# EAGLE board band4.0 (EAGLE 7.6.0)
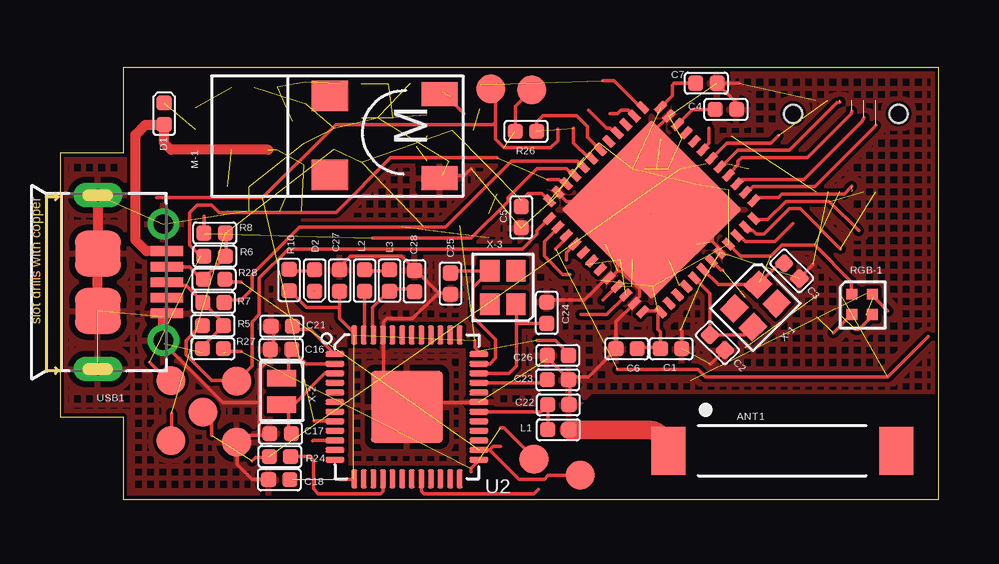
[diagram p0: board, top side]
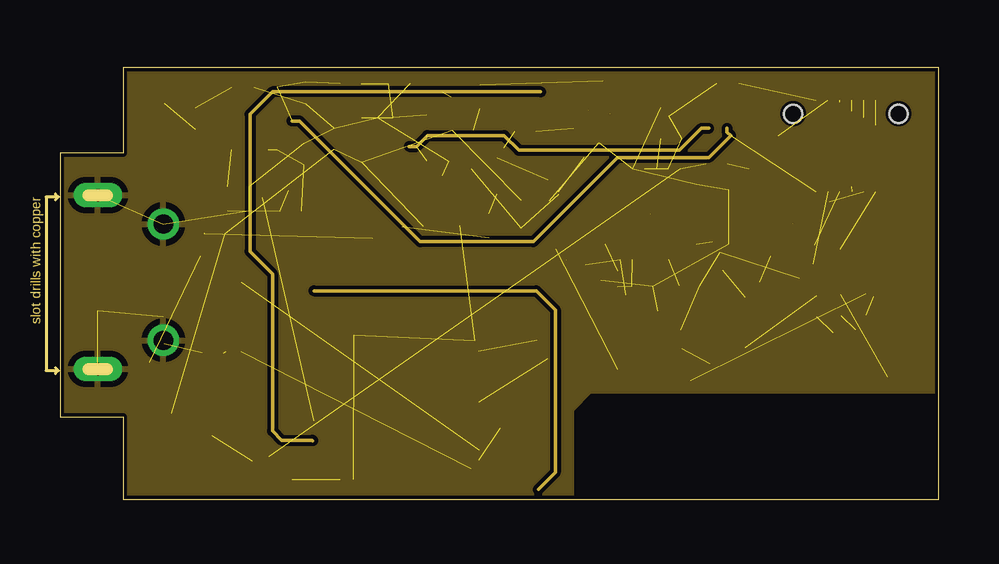
[diagram p1: board, inner layer GND]
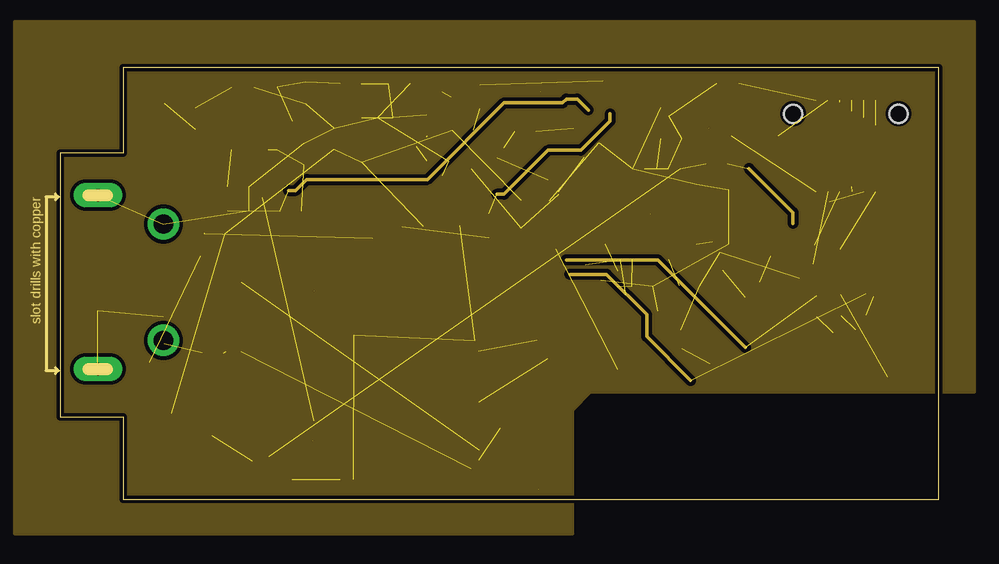
[diagram p2: board, inner layer +3V3]
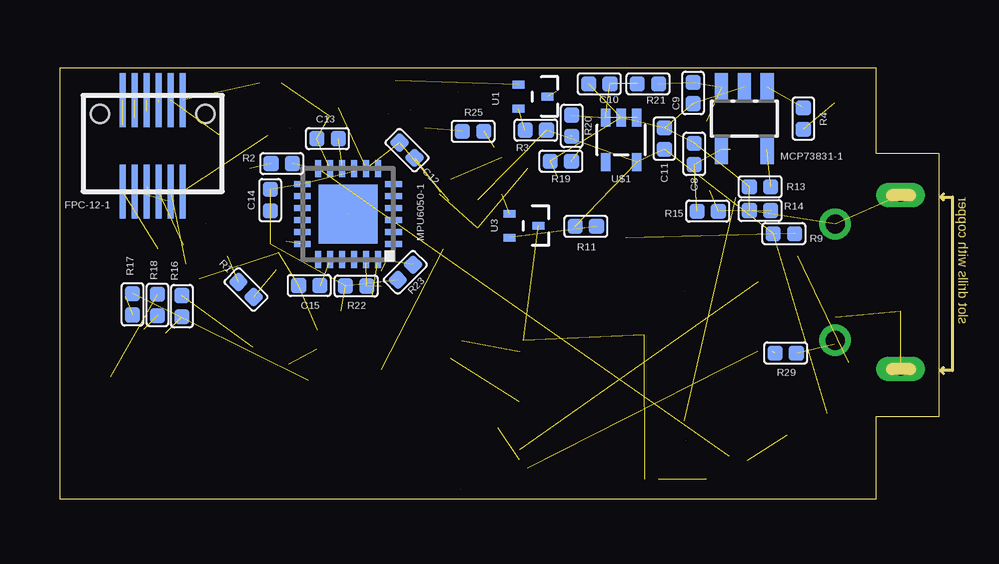
[diagram p3: board, bottom side, seen from below]

Size 36.63 x 18 mm. Coordinates in mm from the lower left corner, seen from the top.
Outline: 2.63,0 36.63,0 36.63,18 2.63,18 2.63,14.44 0,14.44 0,3.44 2.63,3.44 2.63,0
Copper layers (1*2+3*16): Top 0.035mm / dielectric 1.5mm / GND 0.035mm / dielectric 0.15mm / +3V3 0.035mm / dielectric 0.2mm / Bottom 0.035mm
Design rules "default *": minimum track width 6mil, minimum drill 12mil, track to track 6mil, track to pad 6mil, pad to pad 6mil, via to via 6mil, smd to smd 6mil, copper to edge 6mil, drill to drill 8mil, minimum pad ring 10mil, minimum via ring 2mil, stop-mask expansion 4mil, vias tented up to drill 12mil, thermal gap 10mil

## Footprints (pad centres in the part's own frame; a part is rotated, then mirrored left to right if it is on the bottom)
ANTENNA = smd 1.4 x 2: 1 -4.75,0; 2 4.75,0
C0402 = smd 0.635 x 0.635: 1 0,0.445; 2 0,-0.445
LED-0402 = smd 0.635 x 0.635: + -0.445,0; - 0.445,0
FPC-12 = smd 0.25 x 2.25: P$1 0,0; P$2 0.5,0; P$3 1,0; P$4 1.5,0; P$5 2,0; P$6 2.5,0; P$7 2.5,-3.8; P$8 2,-3.8; P$9 1.5,-3.8; P$10 1,-3.8; P$11 0.5,-3.8; P$12 0,-3.8 | hole 0.75: -0.95,-0.56; 3.45,-0.56
L0402 = smd 0.635 x 0.635: 1 -0.445,0; 2 0.445,0
MOTOR = smd 1 x 1.5: 1 -3.556,0; 2 -0.056,0 | smd 1.27 x 1.524: 3 -0.127,4.572; 4 -3.429,4.572
SOT23-5 = smd 0.55 x 1.2: 1 -0.95,-1.3; 2 0,-1.3; 3 0.95,-1.3; 4 0.95,1.3; 5 -0.95,1.3
QFN24-4X4 = smd 0.7 x 0.25: 1 -1.9,1.25; 2 -1.9,0.75; 3 -1.9,0.25; 4 -1.9,-0.25; 5 -1.9,-0.75; 6 -1.9,-1.25; 13 1.9,-1.25; 14 1.9,-0.75; 15 1.9,-0.25; 16 1.9,0.25; 17 1.9,0.75; 18 1.9,1.25 | smd 0.25 x 0.7: 7 -1.25,-1.9; 8 -0.75,-1.9; 9 -0.25,-1.9; 10 0.25,-1.9; 11 0.75,-1.9; 12 1.25,-1.9; 19 1.25,1.9; 20 0.75,1.9; 21 0.25,1.9; 22 -0.25,1.9; 23 -0.75,1.9; 24 -1.25,1.9 | smd 2.45 x 2.45: EXP 0,0
R0402 = smd 0.635 x 0.635: 1 0,0.445; 2 0,-0.445
RGB-LED = smd 0.45 x 0.45: P$1 0,0; P$2 0.85,0; P$3 0.85,-0.85; P$4 0,-0.85
QFN48-7X7 = smd 0.55 x 0.3: 1 -3.275,2.75; 2 -3.275,2.25; 3 -3.275,1.75; 4 -3.275,1.25; 5 -3.275,0.75; 6 -3.275,0.25; 7 -3.275,-0.25; 8 -3.275,-0.75; 9 -3.275,-1.25; 10 -3.275,-1.75; 11 -3.275,-2.25; 12 -3.275,-2.75; 25 3.275,-2.75; 26 3.275,-2.25; 27 3.275,-1.75; 28 3.275,-1.25; 29 3.275,-0.75; 30 3.275,-0.25; 31 3.275,0.25; 32 3.275,0.75; 33 3.275,1.25; 34 3.275,1.75; 35 3.275,2.25; 36 3.275,2.75 | smd 0.3 x 0.55: 13 -2.75,-3.275; 14 -2.25,-3.275; 15 -1.75,-3.275; 16 -1.25,-3.275; 17 -0.75,-3.275; 18 -0.25,-3.275; 19 0.25,-3.275; 20 0.75,-3.275; 21 1.25,-3.275; 22 1.75,-3.275; 23 2.25,-3.275; 24 2.75,-3.275; 37 2.75,3.275; 38 2.25,3.275; 39 1.75,3.275; 40 1.25,3.275; 41 0.75,3.275; 42 0.25,3.275; 43 -0.25,3.275; 44 -0.75,3.275; 45 -1.25,3.275; 46 -1.75,3.275; 47 -2.25,3.275; 48 -2.75,3.275 | smd 5.309 x 5.309: EXP 0,0
PNP = smd 0.325 x 0.5: 1 -0.5,-1.2; 2 0.5,-1.2; 3 0,0
QFN48G-0.4-6X6MM = smd 0.8 x 0.25: 1 -3,2.2; 2 -3,1.8; 3 -3,1.4; 4 -3,1; 5 -3,0.6; 6 -3,0.2; 7 -3,-0.2; 8 -3,-0.6; 9 -3,-1; 10 -3,-1.4; 11 -3,-1.8; 12 -3,-2.2; 25 3,-2.2; 26 3,-1.8; 27 3,-1.4; 28 3,-1; 29 3,-0.6; 30 3,-0.2; 31 3,0.2; 32 3,0.6; 33 3,1; 34 3,1.4; 35 3,1.8; 36 3,2.2 | smd 0.25 x 0.8: 13 -2.2,-3; 14 -1.8,-3; 15 -1.4,-3; 16 -1,-3; 17 -0.6,-3; 18 -0.2,-3; 19 0.2,-3; 20 0.6,-3; 21 1,-3; 22 1.4,-3; 23 1.8,-3; 24 2.2,-3; 37 2.2,3; 38 1.8,3; 39 1.4,3; 40 1,3; 41 0.6,3; 42 0.2,3; 43 -0.2,3; 44 -0.6,3; 45 -1,3; 46 -1.4,3; 47 -1.8,3; 48 -2.2,3 | smd 3 x 3: PAD 0,0
SC-70-5 = smd 0.4 x 0.75: 1 -0.65,-0.925; 2 0,-0.925; 3 0.65,-0.925; 4 0.65,0.925; 5 -0.65,0.925
TEST-POINT = smd 1.2 x 1.2: P$1 0,0
MICRO-USB5+6P-SMD-0.65-AB = smd 0.4 x 1.35: 1 -1.3,2.875; 2 -0.65,2.875; 3 0,2.875; 4 0.65,2.875; 5 1.3,2.875 | smd 1.9 x 1.9: P1 -1.2,0; P2 1.2,0 | drill 0.508 pad 1.016 long: P3 -3.625,0; P4 3.625,0 | drill 0.8: P5 -2.425,2.73; P6 2.425,2.73
16MHZ = smd 0.9 x 0.8: 1 0,-1.1; 2 1.4,-1.1; 3 1.4,0; 4 0,0
32.768KHZ = smd 0.7 x 1.2: P$1 -0.55,0; P$2 0.55,0

## Placement (x,y rotation side)
ANT1  ANT8030-2R4-01A  [ANTENNA]  30.11,2.03 0 top
C1  0.1uf  [C0402]  25.48,6.28 270 top
C2  20pf  [C0402]  27.41,6.53 225 top
C3  20pf  [C0402]  30.5,9.53 225 top
C4  4.7uf  [C0402]  27.76,16.26 270 top
C5  0.1uf  [C0402]  19.23,11.77 0 top
C6  0.1uf  [C0402]  23.62,6.28 270 top
C7  0.1uf  [C0402]  26.95,17.35 270 top
C8  4.7uf  [C0402]  10.18,14.41 0 bottom
C9  4.7uf  [C0402]  10.24,16.95 180 bottom
C10  10uf  [C0402]  14.15,17.33 90 bottom
C11  1uf  [C0402]  11.43,15.04 0 bottom
C12  10nf  [C0402]  22.16,14.56 225 bottom
C13  0.1uf  [C0402]  25.48,15.04 90 bottom
C14  0.1uf  [C0402]  27.86,12.48 180 bottom
C15  2.2nf  [C0402]  26.24,8.92 90 bottom
C16  12pf  [C0402]  9.22,6.25 90 top
C17  12pf  [C0402]  9.19,2.75 90 top
C18  100nf  [C0402]  9.14,0.82 90 top
C21  100nf  [C0402]  9.25,7.22 90 top
C22  0.8pf  [C0402]  20.78,3.94 90 top
C23  100pf  [C0402]  20.75,4.98 90 top
C24  12pf  [C0402]  20.29,7.78 180 top
C25  12pf  [C0402]  16.28,9 0 top
C26  100nf  [C0402]  20.75,6 270 top
C27  4.7uf  [C0402]  11.66,9.12 180 top
C28  1uf  [C0402]  14.78,9.1 0 top
D1  BLUE-0402  [LED-0402]  4.34,16.08 90 top
D2  BLUE-0402  [LED-0402]  10.62,9.12 270 top
FPC-12-1  FPC-12  [FPC-12]  34.01,16.64 0 bottom
L1  3.9nh  [L0402]  20.78,2.9 0 top
L2  10uh  [L0402]  12.7,9.12 90 top
L3  15nh  [L0402]  13.74,9.12 270 top
M-1  MOTOR  [MOTOR]  15.81,16.95 90 top
MCP73831-1  MCP73831  [SOT23-5]  8.1,15.88 180 bottom
MPU6050-1  MPU-6050  [QFN24-4X4]  24.62,11.9 180 bottom
R1  10k  [R0402]  28.87,8.75 45 bottom
R2  0R  [R0402]  27.38,14 270 bottom
R3  0R  [R0402]  16.79,15.4 90 bottom
R4  470R  [R0402]  5.64,15.88 0 bottom
R5  0R  [R0402]  6.37,7.24 90 top
R6  0R  [R0402]  6.45,10.14 90 top
R7  0R  [R0402]  6.4,8.21 270 top
R8  0R  [R0402]  6.45,11.11 90 top
R9  1.5k  [R0402]  6.45,11.08 90 bottom
R10  1k  [R0402]  9.55,9.15 180 top
R11  0R  [R0402]  14.71,11.39 270 bottom
R13  2k  [R0402]  7.44,13.04 90 bottom
R14  10k  [R0402]  7.44,12.05 270 bottom
R15  20k  [R0402]  9.63,12.02 90 bottom
R16  2k  [R0402]  31.55,8.06 180 bottom
R17  2k  [R0402]  33.6,8.13 0 bottom
R18  2k  [R0402]  32.56,8.11 0 bottom
R19  10k  [R0402]  15.75,14.1 270 bottom
R20  10k  [R0402]  15.29,15.58 0 bottom
R21  0R  [R0402]  12.12,17.33 90 bottom
R22  10k  [R0402]  24.28,8.9 270 bottom
R23  10k  [R0402]  22.23,9.47 315 bottom
R24  0R  [R0402]  9.17,1.78 90 top
R25  0R  [R0402]  19.41,15.35 90 bottom
R26  0R  [R0402]  19.43,15.35 270 top
R27  0R  [R0402]  6.37,6.28 90 top
R28  0R  [R0402]  6.43,9.18 90 top
R29  10k  [R0402]  6.37,6.1 270 bottom
RGB-1  RGB-LED  [RGB-LED]  33.01,8.55 0 top
STM32F411-1  STM32F411  [QFN48-7X7]  24.67,12.08 135 top
U1  [PNP]  16.31,16.8 270 bottom
U2  RF-51822  [QFN48G-0.4-6X6MM]  14.46,3.86 0 top
U3  [PNP]  16.69,11.41 270 bottom
U$1  RT9013  [SC-70-5]  13.23,14.99 180 bottom
U$2  TEST-POINT  [TEST-POINT]  7.37,4.93 0 top
U$3  TEST-POINT  [TEST-POINT]  4.62,4.96 0 top
U$4  TEST-POINT  [TEST-POINT]  5.97,3.64 0 top
U$5  TEST-POINT  [TEST-POINT]  4.62,2.44 0 top
U$6  TEST-POINT  [TEST-POINT]  7.37,2.38 0 top
U$7  TEST-POINT  [TEST-POINT]  21.69,1.02 0 top
U$8  TEST-POINT  [TEST-POINT]  19.76,1.68 0 top
U$9  TEST-POINT  [TEST-POINT]  19.66,17.07 0 top
U$10  TEST-POINT  [TEST-POINT]  17.96,17.13 0 top
USB1  ZX62-B-5PA  [MICRO-USB5+6P-SMD-0.65-AB]  1.58,9.05 270 top
X-1  16MHZ  [16MHZ]  29.88,8.17 225 top
X-2  32.768KHZ  [32.768KHZ]  9.25,4.5 90 top
X-3  32MHZ  [16MHZ]  17.92,8.13 90 top

## Library data of the parts
ANT1 FPC-12-1 L1-L3 M-1 MCP73831-1 MPU6050-1 RGB-1 STM32F411-1 U1 U3 U$1-U$10 X-1-X-3 = 1-BT4
C1-C18 C21-C28 = 1-BT4; MPN: CC0402BRNPO9BNR50
D1 D2 = 1-BT4; MPN: BL-HB337A-AV-TRB
R1-R11 R13-R29 = 1-BT4; MPN: RC0402JR-070RL
U2 = 1-BT4; MPN: RF-51822
USB1 = 1-BT4; MPN: ZX62-B-5PA

## Nets
+3.7V: C9.2 FPC-12-1.P$7 MCP73831-1.3 R21.2
+3V3: C1.2 C5.1 C6.1 C7.2 C11.2 C12.2 C14.2 FPC-12-1.P$9 MPU6050-1.8 MPU6050-1.13 R1.1 R3.2 R9.1 R11.2 R22.2 R23.2 RGB-1.P$1 STM32F411-1.1 STM32F411-1.9 STM32F411-1.24 STM32F411-1.36 STM32F411-1.48 U$1.5 U$5.P$1
+5V: C8.2 D1.+ MCP73831-1.4 R15.1 USB1.1
BT_CONTROL: STM32F411-1.26 U3.1
BT_POWER: C18.2 C26.1 C27.1 R10.1 U2.13 U2.36 U2.48 U3.3
GND: C1.1 C2.1 C3.1 C4.1 C5.2 C6.2 C7.1 C8.1 C9.1 C10.1 C11.1 C12.1 C13.1 C14.1 C15.1 C16.1 C17.1 C18.1 C21.1 C22.2 C23.2 C24.2 C25.2 C26.2 C27.2 C28.1 FPC-12-1.P$6 FPC-12-1.P$8 M-1.1 MCP73831-1.2 MPU6050-1.1 MPU6050-1.9 MPU6050-1.11 MPU6050-1.18 MPU6050-1.EXP R13.1 R14.2 R19.2 R29.1 STM32F411-1.8 STM32F411-1.23 STM32F411-1.35 STM32F411-1.44 STM32F411-1.47 STM32F411-1.EXP U2.31 U2.45 U2.PAD U$1.2 U$6.P$1 USB1.5 USB1.P1 USB1.P2 USB1.P3 USB1.P4 USB1.P5 USB1.P6
IIC2_SCL: MPU6050-1.23 R22.1 STM32F411-1.45
IIC2_SDA: MPU6050-1.24 R23.1 STM32F411-1.46
LED1: R17.1 STM32F411-1.38
LED2: R18.1 STM32F411-1.39
LED3: R16.2 STM32F411-1.40
LI_BAT1: R19.1 R20.2 STM32F411-1.19
LI_BAT2: R14.1 R15.2 STM32F411-1.28
MOTOR_CONTROL: STM32F411-1.25 U1.1
N$1: C2.2 STM32F411-1.5 X-1.3
N$2: C3.2 STM32F411-1.6 X-1.1
N$3: R1.2 STM32F411-1.7
N$4: R2.2 STM32F411-1.10
N$5: MCP73831-1.1 R4.1
N$6: D1.- R4.2
N$7: MCP73831-1.5 R13.2
N$8: R16.1 RGB-1.P$4
N$9: R17.2 RGB-1.P$2
N$10: R18.2 RGB-1.P$3
N$11: C21.2 U2.1
N$12: C13.2 MPU6050-1.10
N$13: C16.2 U2.2 X-2.P$2
N$14: C10.2 R20.1 R21.1 U$1.1 U$1.3
N$15: C15.2 MPU6050-1.20
N$16: C17.2 U2.3 X-2.P$1
N$17: R25.2 U2.8 U$10.P$1
N$18: R24.2 U2.16
N$19: D2.+ R10.2
N$20: R26.2 U2.10 U$9.P$1
N$21: D2.- U2.20
N$22: R11.1 U3.2
N$23: R27.2 R29.2 U2.25 U$8.P$1
N$25: R28.2 U2.26 U$7.P$1
N$27: ANT1.1 L1.2
N$28: C4.2 STM32F411-1.22
N$29: M-1.2 U1.3
N$30: R3.1 U1.2
N$31: C22.1 L1.1 U2.30
N$32: C23.1 U2.33
N$33: C24.1 U2.34 X-3.1
N$34: C25.1 U2.35 X-3.3
N$35: L2.2 L3.1
N$36: L2.1 U2.47
N$37: C28.2 L3.2 U2.46
SWCLK: R5.1 STM32F411-1.37 U$2.P$1
SWDIO: R6.1 STM32F411-1.34 U$3.P$1
UART1_RX: R25.1 STM32F411-1.31
UART1_TX: R26.1 STM32F411-1.30
USB_D+: R8.1 R9.2 STM32F411-1.33
USB_D-: R7.1 STM32F411-1.32
USB_PORT2: R5.2 R7.2 R27.1 USB1.3
USB_PORT3: R6.2 R8.2 R28.1 USB1.2
V1: FPC-12-1.P$10 STM32F411-1.13
V2: FPC-12-1.P$11 STM32F411-1.12
V3: FPC-12-1.P$12 STM32F411-1.11
V4: FPC-12-1.P$1 STM32F411-1.14
V5: FPC-12-1.P$2 STM32F411-1.15
V6: FPC-12-1.P$3 STM32F411-1.16
V7: FPC-12-1.P$4 STM32F411-1.17
V8: FPC-12-1.P$5 STM32F411-1.18
WKUP: MPU6050-1.12 R2.1 R24.1 U$4.P$1

## Tracks (layer width: path | path; a pad name or v marks a point on that pad's centre or on a via)
+3.7V  (4 unrouted)
  GND 0.152: 9.68,15.78 9.98,15.78 15.01,10.75 19.74,10.75 23.24,14.25 27.05,14.25 27.97,15.17 27.81,15.32 27.81,15.47
+3V3  (17 unrouted)
  Top 0.152: STM32F411-1.36 20.1,12.76 19.51,12.76 19.23,12.48 C5.1 | STM32F411-1.9 28.4,10.11 28.42,10.14 29.64,10.14 30.1,10.6 31.47,10.6 32.99,9.07 32.99,8.62 RGB-1.P$1 | C7.2 25.6,17.35 25.53,17.28 25.53,16.83 STM32F411-1.24 | STM32F411-1.48 24.31,7.85 24.92,7.85 STM32F411-1.1 24.92,7.7 24.92,7.09 25.03,6.98 C1.2 24.92,6.33 24.16,6.33 C6.1 | 4.65,3.59 4.65,2.52 U$5.P$1
  pour +3V3: -1.88,19.92 38.12,19.92 38.12,5.44 38.12,4.48 22.12,4.48 21.36,3.71 21.36,-1.44 -1.88,-1.44
+5V  (3 unrouted)
  Top 0.406: USB1.1 3.6,10.35 3.15,10.8 3.15,15.22 3.56,15.63 4.33,15.63 D1.+ 4.34,14.86 4.62,14.59 8.69,14.59
BT_CONTROL  (2 unrouted)
  Top 0.152: 22.94,16.08 23.24,16.08 23.39,16.24 23.7,16.24 23.85,16.08 STM32F411-1.26
  +3V3 0.152: 18.21,12.73 18.52,12.73 20.35,14.56 21.72,14.56 22.94,15.78 22.94,16.08
BT_POWER  (5 unrouted)
  Top 0.152: 11.66,8.01 11.66,7.55 11.81,7.4 12.27,6.94 U2.48 | 11.66,8.01 C27.1 | 11.66,8.01 10.29,8.01 9.68,8.62 R10.1 | 9.6,0.82 9.68,0.84 C18.2 | 12.27,0.84 U2.13 12.25,0.84 11.68,0.84 | 17.3,6.63 17.3,6.33 17.45,6.18 U2.36 | 19.89,6.63 20.65,6.63 21.11,6.18 21.11,6.03 C26.1
GND  (32 unrouted)
  Top 0.152: C1.1 25.92,7.03 25.88,7.07 | C2.1 27.15,5.64 27.1,5.64 | C3.1 31.39,9.79 31.39,9.81 | C4.1 28.21,16.54 C7.1 28.3,17.35 | STM32F411-1.23 24.67,15.26 STM32F411-1.EXP | STM32F411-1.EXP 24.62,12.04 MPU6050-1.EXP 24.67,11.94 STM32F411-1.EXP | U2.PAD 15.6,3.86 15.6,4.91 13.49,4.91 13.49,3.05 13.61,3.05 13.61,4.83 15.29,4.83 15.29,3.03 | C23.2 21.26,4.96 21.26,4.05 C22.2 | C26.2 20.35,5.87 21.11,5.11 C23.2 | 23.24,9.53 23.09,9.38 22.94,9.38 STM32F411-1.44 22.78,9.23 21.87,8.31 20.35,8.31 C24.2 | 23.24,9.53 23.39,9.53 24.16,8.77 24.16,8.46 24,8.31 STM32F411-1.47 23.18,7.41 C6.2 23.09,6.18 22.02,5.11 21.26,5.11 C23.2 | 23.24,12.43 24.61,12.43 STM32F411-1.EXP | 23.24,12.43 21.11,12.43 20.8,12.73 STM32F411-1.35 | 27.81,11.97 27.2,11.36 27.2,10.75 27.51,10.44 STM32F411-1.8 | 23.24,12.43 23.24,9.53 | 23.24,12.43 STM32F411-1.EXP | 17.14,13.8 16.84,13.49 15.93,13.49 M-1.1 | 27.81,11.97 STM32F411-1.EXP | 27.81,11.97 C14.1 | C21.1 8.92,7.09 8.92,6.33 C16.1 8.76,6.18 8.76,5.87 8.31,5.42 8.31,4.05 | C18.1 8.61,0.84 8,0.84 7.39,1.45 7.39,2.37 U$6.P$1 7.39,2.52 7.54,2.67 8.31,2.67 | 8.31,2.67 8.61,2.67 C17.1 | 8.31,2.67 8.31,4.05 | 15.77,8.62 16.23,8.62 C25.2 | 15.77,8.62 14.86,9.53 C28.1 14.71,9.68 14.25,10.14 12.12,10.14 11.66,9.68 C27.2 | U2.PAD 13.49,4.96 13.49,6.79 U2.45 13.49,6.94 13.49,7.4 13.64,7.55 14.71,7.55 15.77,8.62 | U2.31 17.45,4.05 15.62,4.05 U2.PAD | 8.31,4.05 6.78,4.05 4.34,6.48 USB1.P6
  Top 0.406: USB1.P2 USB1.P1 USB1.P3 | USB1.P6 4.31,7.61 USB1.5
  pour GND: -3.4,22.23 37.85,22.23 37.85,6.03 37.85,4.48 22.12,4.48 21.36,3.71 21.36,-0.98 -3.4,-0.98
  pour Top (hatched): -3.12,20.68 37.97,20.68 37.97,4.86 37.97,4.48 22.12,4.48 21.36,3.71 21.36,-0.73 -3.12,-0.73
IIC2_SCL  (2 unrouted)
  Top 0.152: 22.63,8.31 23.09,8.77 STM32F411-1.45
IIC2_SDA  (2 unrouted)
  Top 0.152: 21.72,7.7 22.78,7.7 23.55,8.46 STM32F411-1.46
LED1  (2 unrouted)
  Top 0.152: 21.26,9.38 20.95,9.38 20.19,10.14 20.19,10.75 20.65,11.21 STM32F411-1.38
  +3V3 0.152: 21.26,9.38 22.78,9.38 24.46,7.7 24.46,6.79 26.29,4.96
LED2  (2 unrouted)
  Top 0.152: 20.65,10.44 21.11,10.9 STM32F411-1.39 | 23.24,5.42 26.59,5.42 26.9,5.11 34.52,5.11 36.19,6.79
LED3  (2 unrouted)
  Top 0.152: 21.11,9.99 21.11,10.29 21.41,10.6 STM32F411-1.40
  +3V3 0.152: 21.11,9.99 24.92,9.99 28.57,6.33
LI_BAT1  (3 unrouted)
  Top 0.152: 27.05,15.47 27.05,14.86 26.9,14.71 STM32F411-1.19
  GND 0.152: 27.05,15.47 26.75,15.47 25.83,14.56 19.13,14.56 18.52,15.17 15.32,15.17 14.86,14.71 14.55,14.71
LI_BAT2  (3 unrouted)
  Top 0.152: 22.02,16.24 22.78,15.47 22.94,15.47 23.09,15.32 STM32F411-1.28
  +3V3 0.152: 22.02,16.24 21.56,16.69 21.11,16.69 20.95,16.54 18.52,16.54 15.32,13.34 10.29,13.34 9.83,12.88 9.52,12.88
MOTOR_CONTROL  (1 unrouted)
  Top 0.152: 22.63,17.46 23.09,17.46 24.16,16.39 STM32F411-1.25
N$1
  Top 0.152: STM32F411-1.5 27.09,8.59 C2.2 28.55,6.85 X-1.3
N$2
  Top 0.152: STM32F411-1.6 27.44,8.95 X-1.1 29.99,9.84 C3.2
N$3  (1 unrouted)
  Top 0.152: STM32F411-1.7 27.54,9.56 27.61,9.56
N$4  (2 unrouted)
  Top 0.152: 30.56,11.51 29.79,10.75 28.57,10.75 28.42,10.9 28.27,10.9 STM32F411-1.10
  +3V3 0.152: 30.56,11.51 30.56,11.97 28.73,13.8
N$5  (1 unrouted)
N$6  (1 unrouted)
N$7  (1 unrouted)
N$8  (1 unrouted)
  Top 0.152: 32.23,6.94 32.99,7.7 RGB-1.P$4
N$9  (1 unrouted)
  Top 0.152: 34.52,7.85 33.91,8.46 RGB-1.P$2
N$10  (1 unrouted)
  Top 0.152: 33.15,7.09 33.3,7.09 33.76,7.55 33.76,7.7 RGB-1.P$3
N$11
  Top 0.152: C21.2 9.83,7.09 10.44,7.09 11.35,6.18 U2.1
N$12  (1 unrouted)
N$13
  Top 0.152: X-2.P$2 9.37,5.11 9.52,5.26 9.52,6.18 C16.2 10.26,5.66 U2.2
N$14  (4 unrouted)
N$15  (1 unrouted)
N$16
  Top 0.152: 9.52,3.74 9.52,2.82 C17.2 | 9.52,3.74 9.37,3.89 X-2.P$1 9.52,3.74 | 9.52,3.74 11.05,5.26 11.35,5.26 U2.3
N$17  (2 unrouted)
  Top 0.152: 18.06,17 U$10.P$1 18.16,16.92 18.16,15.73 | 10.59,3.28 11.35,3.28 U2.8 | 4.04,12.58 8.46,12.58 11.51,15.63 18.06,15.63 18.16,15.73 | 20.75,15.45 20.75,14.97 20.45,14.66 18.52,14.66 18.16,15.02 18.16,15.73
N$18
  Top 0.152: U2.16 13.46,0.34 13.36,0.23 10.78,0.23 10.77,0.23 10.57,0.44 10.57,1.63 10.41,1.78 R24.2
N$19
  Top 0.152: D2.+ 10.59,9.53 9.68,9.53 R10.2
N$20  (2 unrouted)
  Top 0.152: U2.10 10.55,2.46 10.54,2.44 | 20.04,17 19.96,16.92 U$9.P$1 18.99,16.4 R26.2
  GND 0.152: 20.04,17 8.86,17 7.92,16.06 7.92,10.34 8.86,9.4 8.86,2.85 9.25,2.47 10.52,2.47 10.54,2.44
N$21  (2 unrouted)
  Top 0.152: U2.20 15.06,0.34 15.17,0.23 19.76,0.23 19.94,0.41 | D2.- 10.59,8.69
  GND 0.152: 10.59,8.69 19.86,8.69 20.65,7.91 20.65,1.12 19.94,0.41
N$22  (1 unrouted)
N$23  (3 unrouted)
  Top 0.152: 7.54,6.18 6.93,6.18 R27.2 | 17.14,1.15 17.14,1.3 17.45,1.61 U2.25 | 18.36,2.98 18.52,2.98 19.74,1.76 U$8.P$1
N$25  (1 unrouted)
  Top 0.152: 7.54,9.07 6.93,9.07 R28.2 | 18.36,2.22 18.06,2.22 17.91,2.06 | 17.91,2.06 17.6,2.06 U2.26 | 17.91,2.06 19.13,0.84 20.19,0.84 20.35,1 21.56,1 U$7.P$1
N$27
  Top 0.762: L1.2 24.5,2.9 arc-90 ANT1.1
N$28
  Top 0.152: STM32F411-1.22 26.37,16.26 C4.2
N$29  (1 unrouted)
  Top 0.152: 16.84,16.08 15.93,17 M-1.2
N$30  (1 unrouted)
N$31
  Top 0.152: L1.1 20.35,2.98 20.35,3.89 C22.1 20.05,3.66 U2.30
N$32
  Top 0.152: U2.33 20.18,4.86 C23.1
N$33
  Top 0.152: U2.34 18.71,5.26 19.02,5.57 19.02,7.35 | 19.02,7.35 X-3.1 | C24.1 19.04,7.33 19.02,7.35
N$34
  Top 0.152: C25.1 16.38,9.53 X-3.3 17.22,8.84 17.22,7.6 18.16,6.66 18.16,5.9 17.92,5.66 U2.35
N$35
  Top 0.152: L2.2 12.73,9.53 13.64,9.53 L3.1
N$36
  Top 0.152: 12.67,8.52 L2.1 12.7,6.95 12.67,6.93 U2.47
N$37
  Top 0.152: C28.2 14.71,8.77 13.79,8.77 L3.2 13.64,8.62 13.03,8.01 13.03,6.94 U2.46
SWCLK
  Top 0.152: STM32F411-1.37 20.35,11.66 19.89,11.21 19.89,11.05 19.28,10.44 9.52,10.44 8.31,9.23 8.31,7.7 8,7.4 8,5.57 7.39,4.96 U$2.P$1 7.24,4.96 6.32,4.96 5.26,6.03 5.26,6.63 5.87,7.24 R5.1
SWDIO  (2 unrouted)
  Top 0.152: 20.35,13.34 20.8,13.34 20.95,13.19 21.11,13.19 STM32F411-1.34 | 18.21,14.25 13.79,14.25 11.51,11.97 6.63,11.97 6.32,12.27 5.71,12.27 5.41,11.97 5.41,11.66 5.41,10.6 5.87,10.14 R6.1 | 3.73,5.72 4.5,4.96 U$3.P$1
UART1_RX  (1 unrouted)
  Top 0.152: 21.41,15.47 21.41,14.86 22.02,14.25 STM32F411-1.31
UART1_TX
  Top 0.152: STM32F411-1.30 22,15.1 22,15.55 21.54,16.01 20.14,16.01 19.88,15.74 R26.1
USB_D+  (2 unrouted)
  Top 0.152: 13.03,10.9 17.14,10.9 18.67,12.43 18.67,12.58 19.89,13.8 21.11,13.8 21.26,13.65 21.41,13.65 STM32F411-1.33 | 6.02,11.82 6.02,11.21 R8.1
USB_D-
  Top 0.152: STM32F411-1.32 21.72,13.95 21.56,14.1 18.82,14.1 16.08,11.36 9.98,11.36 8,9.38 8,8.77 7.54,8.31 6.93,8.31 R7.1
USB_PORT2
  Top 0.152: USB1.3 4.5,8.92 5.26,8.92 5.87,8.31 R7.2 6.02,8.16 6.93,7.24 R5.2 5.93,6.36 R27.1
USB_PORT3
  Top 0.152: 6.93,10.14 6.02,9.23 R28.1 5.87,9.23 5.41,9.68 4.5,9.68 USB1.2 | 6.93,10.14 6.93,11.05 R8.2 | 6.93,10.14 R6.2
V1  (1 unrouted)
  Top 0.152: STM32F411-1.13 29.03,12.58 29.95,12.58 30.1,12.73 32.69,12.73 32.99,13.04 33.01,13.06
V2  (1 unrouted)
  Top 0.152: 33.3,11.21 32.08,12.43 30.25,12.43 29.49,11.66 29.03,11.66 STM32F411-1.12
V3  (1 unrouted)
  Top 0.152: 32.54,10.44 30.86,12.12 30.4,12.12 29.34,11.05 29.03,11.05 28.88,11.21 28.57,11.21 STM32F411-1.11
V4  (1 unrouted)
  Top 0.152: STM32F411-1.14 28.57,12.88 28.73,12.88 28.88,13.04 31.47,13.04 33.91,15.47 34.01,15.6
V5  (1 unrouted)
  Top 0.152: STM32F411-1.15 28.27,13.19 28.42,13.34 31.01,13.34 33.45,15.78 33.52,15.92
V6  (1 unrouted)
  Top 0.152: STM32F411-1.16 27.97,13.65 28.27,13.95 28.27,14.1 28.42,14.25 31.17,14.25 32.99,16.08 33.01,16.2
V7  (1 unrouted)
  Top 0.152: STM32F411-1.17 27.66,13.95 28.27,14.56 30.4,14.56 32.38,16.54 32.51,16.57
V8  (1 unrouted)
  Top 0.152: 29.95,15.17 29.64,14.86 27.81,14.86 27.2,14.25 STM32F411-1.18
WKUP  (3 unrouted)
  Top 0.152: 8,1.61 8.15,1.76 8.61,1.76 R24.1 | 6.32,2.67 6.32,3.28 6.02,3.59 U$4.P$1